# Altium PCB SCT2430 TEST.PcbDoc
Units mil, origin at the board's own origin, x right, y up, seen from the top; angles counter-clockwise.
Board outline 2710 x 1815 mil, 2 copper layers (Top Layer, Bottom Layer); 30 components, 10 nets, 69 pads, 2 vias.
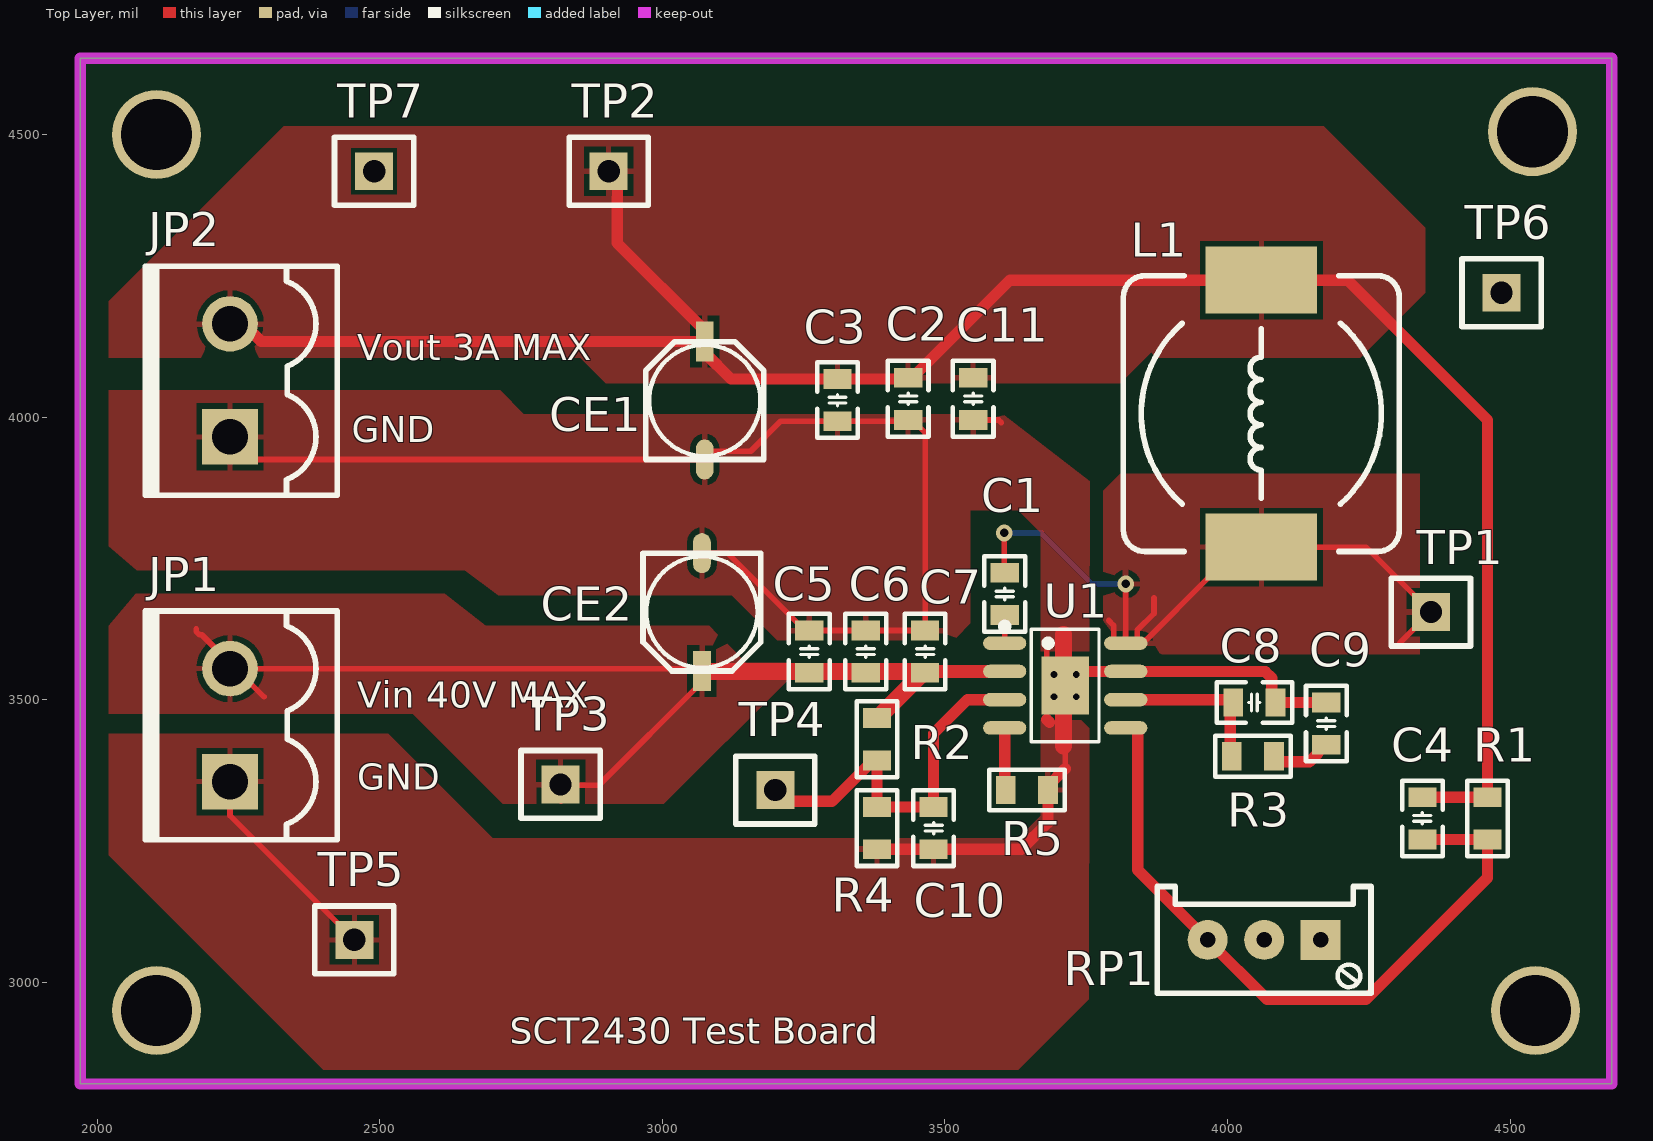
[diagram p0: Top Layer view]
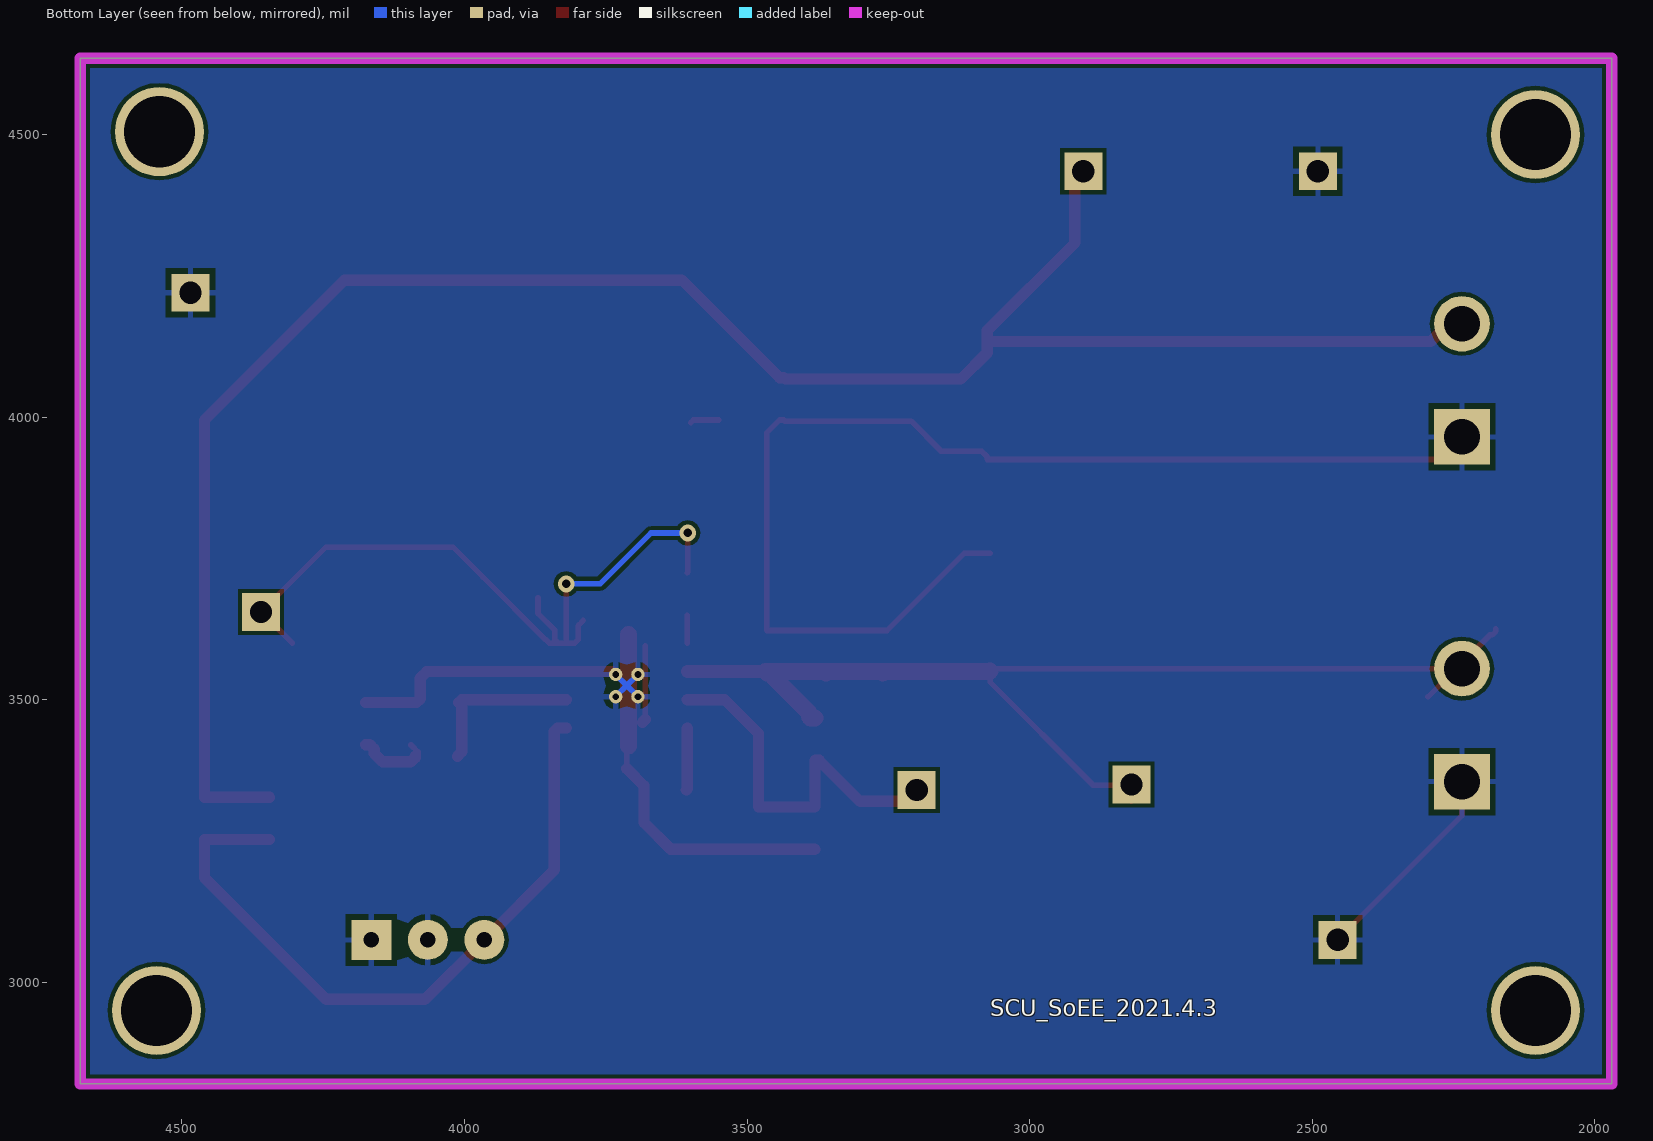
[diagram p1: Bottom Layer view, seen from below]

## Layer stack, top to bottom
Top Solder: solder mask 0.4, Solder Resist, Dk 3.5
Top Layer: signal copper 1.4
Dielectric 1: dielectric 12.6, FR-4, Dk 4.8
Bottom Layer: signal copper 1.4
Bottom Solder: solder mask 0.4, Solder Resist, Dk 3.5

## Board outline
1970,2820 4680,2820 4680,4635 1970,4635

## Design rules (kind name [scope] priority, off if disabled: settings)
Clearance [All] p1: gap=7 ignorepadtopadclearanceinfootprint=FALSE except(0: Arc-Text Arc-Hole Track-Text Track-Hole SMDPad-Text SMDPad-Hole THPad-Text THPad-Hole Via-Text Via-Hole Fill-Text Fill-Hole Poly-Text Poly-Hole Region-Text Region-Hole Text-Text Text-Hole)
MinimumSolderMaskSliver [All] p1: minsoldermaskwidth=0
PolygonConnect [All] p1: connectstyle=Relief reliefconductorwidth=10 reliefentries=4 polygonreliefangle="90 Angle" airgapwidth=10
RoutingVias [All] p1: holewidth=28 width=50 viastyle="Through Hole" minholewidth=28 minwidth=50 maxholewidth=28 maxwidth=50
SilkToSilkClearance [All] p1 off: silktosilkclearance=10
SilkToSolderMaskClearance [IsPad] p1 off: minsilkscreentomaskgap=10 clearancetoexposedcopper=TRUE
SolderMaskExpansion [All] p1: expansion=4 istentingtop=FALSE
Width [All] p1: maxlimit=40 minlimit=10 preferedwidth=10
27 further rules are at their usual default settings.

## Components (designator, comment, footprint, x,y, rotation, side; value= is the part's Value field where it differs from the comment)
C1 "104" "C 0805_L" 3605.78,3687.01 r90 top
C2 "105/50" "C 0805_L" 3435,4032.4 r90 top
C3 "104/50" "C 0805_L" 3310,4030 r90 top
C4 "20/50V" "C 0805_L" 4345,3290 r90 top
C5 "104/50" "C 0805_L" 3260,3585 r270 top
C6 "105/50" "C 0805_L" 3360,3585 r270 top
C7 "105/50" "C 0805_L" 3465,3585 r270 top
C8 "20/50V" "C 0805_L" 4047.6,3495 r180 top
C9 "272/50" "C 0805_L" 4175,3457.6 r270 top
C10 "103/50" "C 0805_L" 3480,3272.6 r90 top
C11 "105/50" "C 0805_L" 3550,4032.4 r90 top
CE1 "10uF 50V" "CM C(5*5.4)" 3075,4029.33 r90 top
CE2 "10uF 50V" "CM C(5*5.4)" 3070,3655 r270 top
JP1 "HDR-1X2" KF2EDGK5.08-LI-2P 2235,3455 r90 top
JP2 "HDR-1X2" KF2EDGK5.08-LI-2P 2235,4065 r90 top
L1 "10uH" CDRH127 4060,4006.22 r90 top
R1 "68K" "R 0805_L" 4460,3290 r90 top
R2 "200K" "R 0805_L" 3380,3430 r90 top
R3 "47K" "R 0805_L" 4045,3400 r180 top
R4 "100K" "R 0805_L" 3380,3272.6 r90 top
R5 "200K" "R 0805_L" 3645,3340 r180 top
RP1 "203" 3296W 4065,3075 r180 top
TP1 "SW" "TEST TP1.4_Y" 4360,3655 r180 top
TP2 "TEST TP" "TEST TP1.4_R" 2905,4435 r180 top
TP3 "TEST TP" "TEST TP1.4_R" 2820,3350 r180 top
TP4 "TEST TP" "TEST TP1.4_G" 3200,3340 r180 top
TP5 "SW" "TEST TP1.4_BK" 2455,3075 r180 top
TP6 "SW" "TEST TP1.4_BK" 4485,4220 r180 top
TP7 "SW" "TEST TP1.4_BK" 2490,4435 r180 top
U1 "SCT2430" "ESOP - 8" 3712.58,3525.57 r270 top

## Footprints (in the part's own frame and the unit in brackets; to place one, negate y for a bottom-side part, rotate by r counter-clockwise, add the part's x,y. Pads: shape width x height; smd on the part's side, far side on the other; paste and mask are expansions set on the pad)
3296W [mm] "Precise Multi-Winding Adjustable Resistor"
  rect 1.8x1.8 hole 0.7: 1(-2.54,0)
  round 1.8 hole 0.7: 2(0,0) 3(2.54,0)
  silkscreen extent -4.8,-2.4 4.8,2.4, body extent -4.75,-2.4 4.75,2.4, height 11.52
"C 0805_L" [mil] "无极性贴片电容"
  rect 35x50 smd: 1(-37.4,0) 2(37.4,0)
  silkscreen extent -67,-36 67,36, body extent -39,-24 39,24, height 20
CDRH127 [mm] "12*12*8mm（长宽高）"
  rect 3x5 smd: 1(-6,0) 2(6,0)
  silkscreen extent -6.2,-6.2 6.2,6.2, body extent -6,-6 6,6, height 7.8
"CM C(5*5.4)" [mm] "贴片电解电容，直径5mm，高5.4mm"
  rect 1.8x0.8 smd: 1(2.65,0)
  oval 1.8x0.8 smd: 2(-2.65,0)
  silkscreen extent -2.65,-2.65 2.65,2.65, body extent -2.95,-2.65 2.95,2.65, height 5.4
"ESOP - 8" [mm]
  oval 0.602x1.941 smd: 1(-1.891,-2.713) 2(-0.621,-2.713) 3(0.649,-2.713) 4(1.919,-2.713) 5(1.919,2.728) 6(0.649,2.728) 7(-0.621,2.728) 8(-1.891,2.728)
  round 0.6 hole 0.3: 9(-0.485,0.508) 9(-0.485,-0.492) 9(0.515,0.508) 9(0.515,-0.492)
  rect 2.595x2.15 smd: 9(0.014,0.008)
  silkscreen extent -2.79,-2.86 2.54,1.53
KF2EDGK5.08-LI-2P [mm] "立插端子"
  rect 2.5x2.5 hole 1.6: 1(-2.54,0)
  round 2.5 hole 1.6: 2(2.54,0)
  silkscreen extent -5.16,-4.83 5.13,3.81, body extent -5.08,-4.75 5.08,3.75, height 11.25
"R 0805_L" [mil] "1/8W贴片电阻   https://item.taobao.com/item.htm?ft=t&id=613637044352"
  rect 35x50 smd: 1(-37.4,0) 2(37.4,0)
  silkscreen extent -67,-36 67,36, body extent -39,-25 39,25, height 20
"TEST TP1.4_BK" [mm] "黑色，测试环"
  rect 1.7x1.7 hole 1: 1(0,0)
  silkscreen extent -1.78,-1.52 1.78,1.52, body extent -1.67,-1.4 1.67,1.4, height 5.41
"TEST TP1.4_G" [mm] "绿色，测试环"
  rect 1.7x1.7 hole 1: 1(0,0)
  silkscreen extent -1.78,-1.52 1.78,1.52, body extent -1.67,-1.4 1.67,1.4, height 5.41
"TEST TP1.4_R" [mm] "红色，测试环"
  rect 1.7x1.7 hole 1: 1(0,0)
  silkscreen extent -1.78,-1.52 1.78,1.52, body extent -1.67,-1.4 1.67,1.4, height 5.41
"TEST TP1.4_Y" [mm] "黄色，测试环"
  rect 1.7x1.7 hole 1: 1(0,0)
  silkscreen extent -1.78,-1.52 1.78,1.52, body extent -1.67,-1.4 1.67,1.4, height 5.41

## Part data
C1 C2 C3 C4 C5 C6 C7 C8 C9 C10 C11: library part C, "贴片电容", BOM名称=贴片电容, 下单链接=https://item.taobao.com/item.htm?ft=t&id=613637044352, 淘宝ID=小糖豆的小窝窝
CE1 CE2: library part CE_SMD, "贴片电解电容", BOM名称=贴片电解电容, 下单链接=https://item.taobao.com/item.htm?ft=t&id=613637044352, 淘宝ID=小糖豆的小窝窝
JP1 JP2: library part "Header 2", "2P接插件", BOM名称=2P接插件, 下单链接=https://item.taobao.com/item.htm?ft=t&id=613637044352, 淘宝ID=小糖豆的小窝窝
L1: library part L-CDRH, "功率屏蔽电感", BOM名称=功率屏蔽电感, 下单链接=https://item.taobao.com/item.htm?ft=t&id=613637044352, 淘宝ID=小糖豆的小窝窝
R1 R2 R3 R4 R5: library part R, "贴片电阻", BOM名称=贴片电阻, 下单链接=https://item.taobao.com/item.htm?ft=t&id=613637044352, 淘宝ID=小糖豆的小窝窝
RP1: library part RP, "单联电位器", BOM名称=单联电位器, 下单链接=https://item.taobao.com/item.htm?ft=t&id=613637044352, 淘宝ID=小糖豆的小窝窝
TP1 TP5 TP6 TP7: library part "TEST TP", "测试环", BOM名称=测试环, 下单链接=https://item.taobao.com/item.htm?ft=t&id=613637044352, 淘宝ID=小糖豆的小窝窝
TP2 TP3 TP4: "测试环", BOM名称=测试环, 下单链接=https://item.taobao.com/item.htm?ft=t&id=613637044352, 淘宝ID=小糖豆的小窝窝
U1: library part TPS54340

## Free pads (board coordinates)
  round 157.48 hole 125.98: Q(2105,2950) Q(2105,4500) Q(4540,4505) Q(4545,2950)

## Via types
v1: diameter 30, hole 15, Top Layer to Bottom Layer, 2 vias

## Nets (pads, with @x,y where several pads share a name; then routed paths per layer and width w, separated by ;. In a path a pad name is that pad's centre, name@x,y a point inside that pad or via, vN(x,y) a via of type N, cw(c..) or ccw(c..) an arc to the next point about the centre after c; other vN are vias at no path point)
GND: C2.1 C3.1 C5.1 C6.1 C7.1 C8.1 C9.1 C10.1 C11.1 CE1.2 CE2.2 JP1.1 JP2.1 R4.1 R5.1 RP1.1 RP1.2 TP5.1 TP6.1 TP7.1 U1.7 U1.9 | length 4056.2
  Top Layer w10: JP1.1 2235,3295 TP5.1 ; JP2.1 2275,3925 CE1.2 3075,3929.76 3084.93,3939.68 3156.45,3939.68 3209.37,3992.6 C3.1 3432.6,3992.6 C2.1 3442.5,3995 3465,3972.5 C7.1 C6.1 C5.1 3252.5,3622.4 3115.57,3759.33 CE2.2 ; C11.1 3595,3995 3600,3990 ; 3680,3465 3680,3595 ; 3710,3417.89 3712.89,3415 ; 3712.89,3377.99 3712.89,3415 ; U1.9@3737.89,3550 3732.57,3544.68 3712.89,3525 3712.89,3415
  Top Layer w20: R4.1 C10.1 3635.2,3235.2 3682.4,3282.4 R5.1 3682.4,3347.5 3712.89,3377.99 ; 3680,3465 3685,3460 ; U1.9@3737.89,3550 U1.7 4066.64,3550 4078.36,3538.28 4078.36,3501.64 C8.1 C9.1
  Top Layer w30: 3710,3417.89 3710,3615
  Bottom Layer w10: U1.9@3693.2,3505.31 3712.89,3524.99 ; U1.9@3693.2,3544.68 3712.89,3524.99 ; U1.9@3732.57,3505.31 3712.89,3524.99 ; U1.9@3732.57,3544.68 3712.89,3524.99
NetC1_1: C1.1 U1.1 | length 49.6
  Top Layer w10: U1.1 C1.1
NetC1_2: C1.2 L1.1 TP1.1 U1.8 | length 1320.1
  Top Layer w10: v1(3605,3795) 3605,3725.2 C1.2 ; 3790,3640 3798.64,3631.36 3798.64,3606.33 3804.97,3600 U1.8 ; v1(3820,3705) U1.8 ; 3870,3680 3870,3652.57 3840.41,3622.98 3840.41,3606.33 U1.8@3834.08,3600 ; 4305,3600 TP1.1 4245,3770 4020.63,3770 3966.57,3715.94 3857.48,3606.85 3856.92,3606.85 3850.07,3600 U1.8@3834.08,3600 ; U1.8 U1.8@3834.08,3600
  Bottom Layer w10: v1(3605,3795) 3670,3795 3760,3705 v1(3820,3705)
NetC2_2: C2.2 C3.2 C4.2 C11.2 CE1.1 JP2.2 L1.2 R1.2 TP2.1 | length 3575.1
  Top Layer w20: JP2.2 2258.93,4165 2290.27,4133.66 CE1.1 ; TP2.1@2920,4410 2920,4308.35 3075,4153.35 CE1.1 ; C4.2 R1.2 4460,3995 4212.56,4242.44 4099.37,4242.44 L1.2 3615.14,4242.44 3442.5,4069.8 C2.2 3432.6,4067.4 C3.2 3121.58,4067.4 3075,4113.98 CE1.1
NetC4_1: C4.1 R1.1 RP1.3 U1.5 | length 1254
  Top Layer w20: U1.5 3835.03,3450 3841.36,3443.67 3841.36,3198.64 RP1.3 4070,2970 4245,2970 4460,3185 R1.1 C4.1
NetC5_2: C5.2 C6.2 C7.2 CE2.1 JP1.2 R2.2 TP3.1 U1.2 | length 2029.3
  Top Layer w10: 2175,3625 2175,3620.86 2180.86,3615 2185,3615 JP1.2@2240,3560 ; JP1.2 JP1.2@2240,3560 ; 2295,3505 JP1.2@2245,3555 ; TP3.1@2820,3320 2848.46,3348.46 2887.48,3348.46 3070,3530.98 CE2.1 3065.67,3555 JP1.2@2245,3555 ; JP1.2@2240,3560 JP1.2@2245,3555
  Top Layer w23: C7.2@3467.4,3550 U1.2
  Top Layer w30: CE2.1 3070.67,3550 3257.6,3550 C5.2 3262.4,3550 3357.6,3550 C6.2 3362.4,3550 3462.6,3550 C7.2 ; R2.2 3387.5,3467.4 3390,3469.9 3390,3476.51 3455,3541.5 3455,3545.1 3457.5,3547.6 C7.2 ; C7.2@3467.4,3550 C7.2
NetC8_2: C8.2 R3.2 U1.6 | length 285.3
  Top Layer w20: U1.6 C8.2@4005.2,3500 ; C8.2 4005.2,3490 4005.2,3407.4 R3.2@4012.6,3400
NetC9_2: C9.2 R3.1 | length 135.6
  Top Layer w10: R3.1 4082.4,3407.5 R3.1@4095.1,3420.2
  Top Layer w20: R3.1@4087.4,3400 4087.4,3397.5 4094.9,3390 4144.8,3390 4160,3405.2 4160,3412.7 4167.5,3420.2 C9.2
NetC10_2: C10.2 R2.1 R4.2 TP4.1 U1.3 | length 685.7
  Top Layer w20: TP4.1@3200,3350 3230,3320 3299.91,3320 3372.5,3392.6 R2.1 R4.2 C10.2 3480,3440 3540,3500 U1.3
NetR5_2: R5.2 U1.4 | length 110.7
  Top Layer w20: U1.4 3605.79,3341.82 R5.2

## Polygon pours and split planes (outlines as drawn)
GND on Top Layer "NONET_L02_P-001" (solid, remove dead copper, pour order 4): 2020,4047.17 2020,3771.49 2070,3728.94 2649.94,3728.94 2710.01,3685.01 3123.14,3685.01 3203.15,3605 3515,3605 3545,3635 3545,3835 3630,3835 3670,3795 3670,3295 3630,3255 2700,3255 2515,3440 2020,3440 2020,3225 2400,2845 3630,2845 3755,2970 3756.2,3886.74 3602.56,4005 2755,4005 2712.83,4047.17
NetC2_2 on Top Layer "NONET_L02_P-001" (solid, remove dead copper, pour order 6): 2020,4105 2855,4105 2900,4060 3810,4060 3865,4115 3875,4105 4235,4105 4350,4220 4350,4335 4170,4515 2330,4515 2020,4205
GND on Top Layer "NONET_L02_P-001" (solid, remove dead copper, pour order 8): 2980,3325
NetC5_2 on Top Layer "NONET_L02_P-001" (solid, remove dead copper, pour order 7): 2068.39,3687.07 2020,3631.07 2020,3475.45 2557.93,3475.45 2717.93,3315.45 3002.93,3315.45 3222.93,3535.45 3222.93,3565.45 3147.93,3565.45 3082.93,3630.45 2687.93,3630.45 2615,3687.07
NetC1_2 on Top Layer "NONET_L02_P-001" (solid, remove dead copper, pour order 5): 3790,3580 4340,3580 4340,3900 3810,3900 3780,3870 3780,3590
GND on Bottom Layer "NONET_L02_P-001" (solid, remove dead copper, pour order 3): 1760,4865 1760,2880 1630,2750 1805,2575 5930,2575 5930,4840 6025,4935

## Keep-outs
Keep-Out Layer:
  the board outline again, w20

## Silkscreen, mask and mechanical layers (free items; w line width, h text height)
Top Overlay:
  text "Vout 3A MAX" at 2460,4085 h80
  text "GND" at 2450,3940 h80
  text "Vin 40V MAX" at 2460,3470 h80
  text "GND" at 2460,3325 h80
  text "SCT2430 Test Board" at 2730,2875 h80
Bottom Overlay:
  text "SCU_SoEE_2021.4.3" at 3070,2930 h50
Mechanical 1:
  lines w10: 1965,2820 ccw(c1970,2820) 1970,2815 ; 1965,2820 ccw(c1970,2820) 1970,2815 ; 1965,2820 1965,4635 ; 1965,4635 cw(c1970,4635) 1970,4640 ; 1965,4635 cw(c1970,4635) 1970,4640 ; 1970,2815 4680,2815 ; 1970,4640 4680,4640 ; 4680,2815 ccw(c4680,2820) 4685,2820 ; 4680,2815 ccw(c4680,2820) 4685,2820 ; 4680,4640 cw(c4680,4635) 4685,4635 ; 4680,4640 cw(c4680,4635) 4685,4635 ; 4685,2820 4685,4635